# Altium PCB Regulador_Inversor.PcbDoc
Units mm, origin at the board's own origin, x right, y up, seen from the top; angles counter-clockwise.
Board outline 40 x 45 mm, 2 copper layers (Top Layer, Bottom Layer); 16 components, 11 nets, 47 pads, 30 vias.
Unrouted connection lines stored in the file: 1.
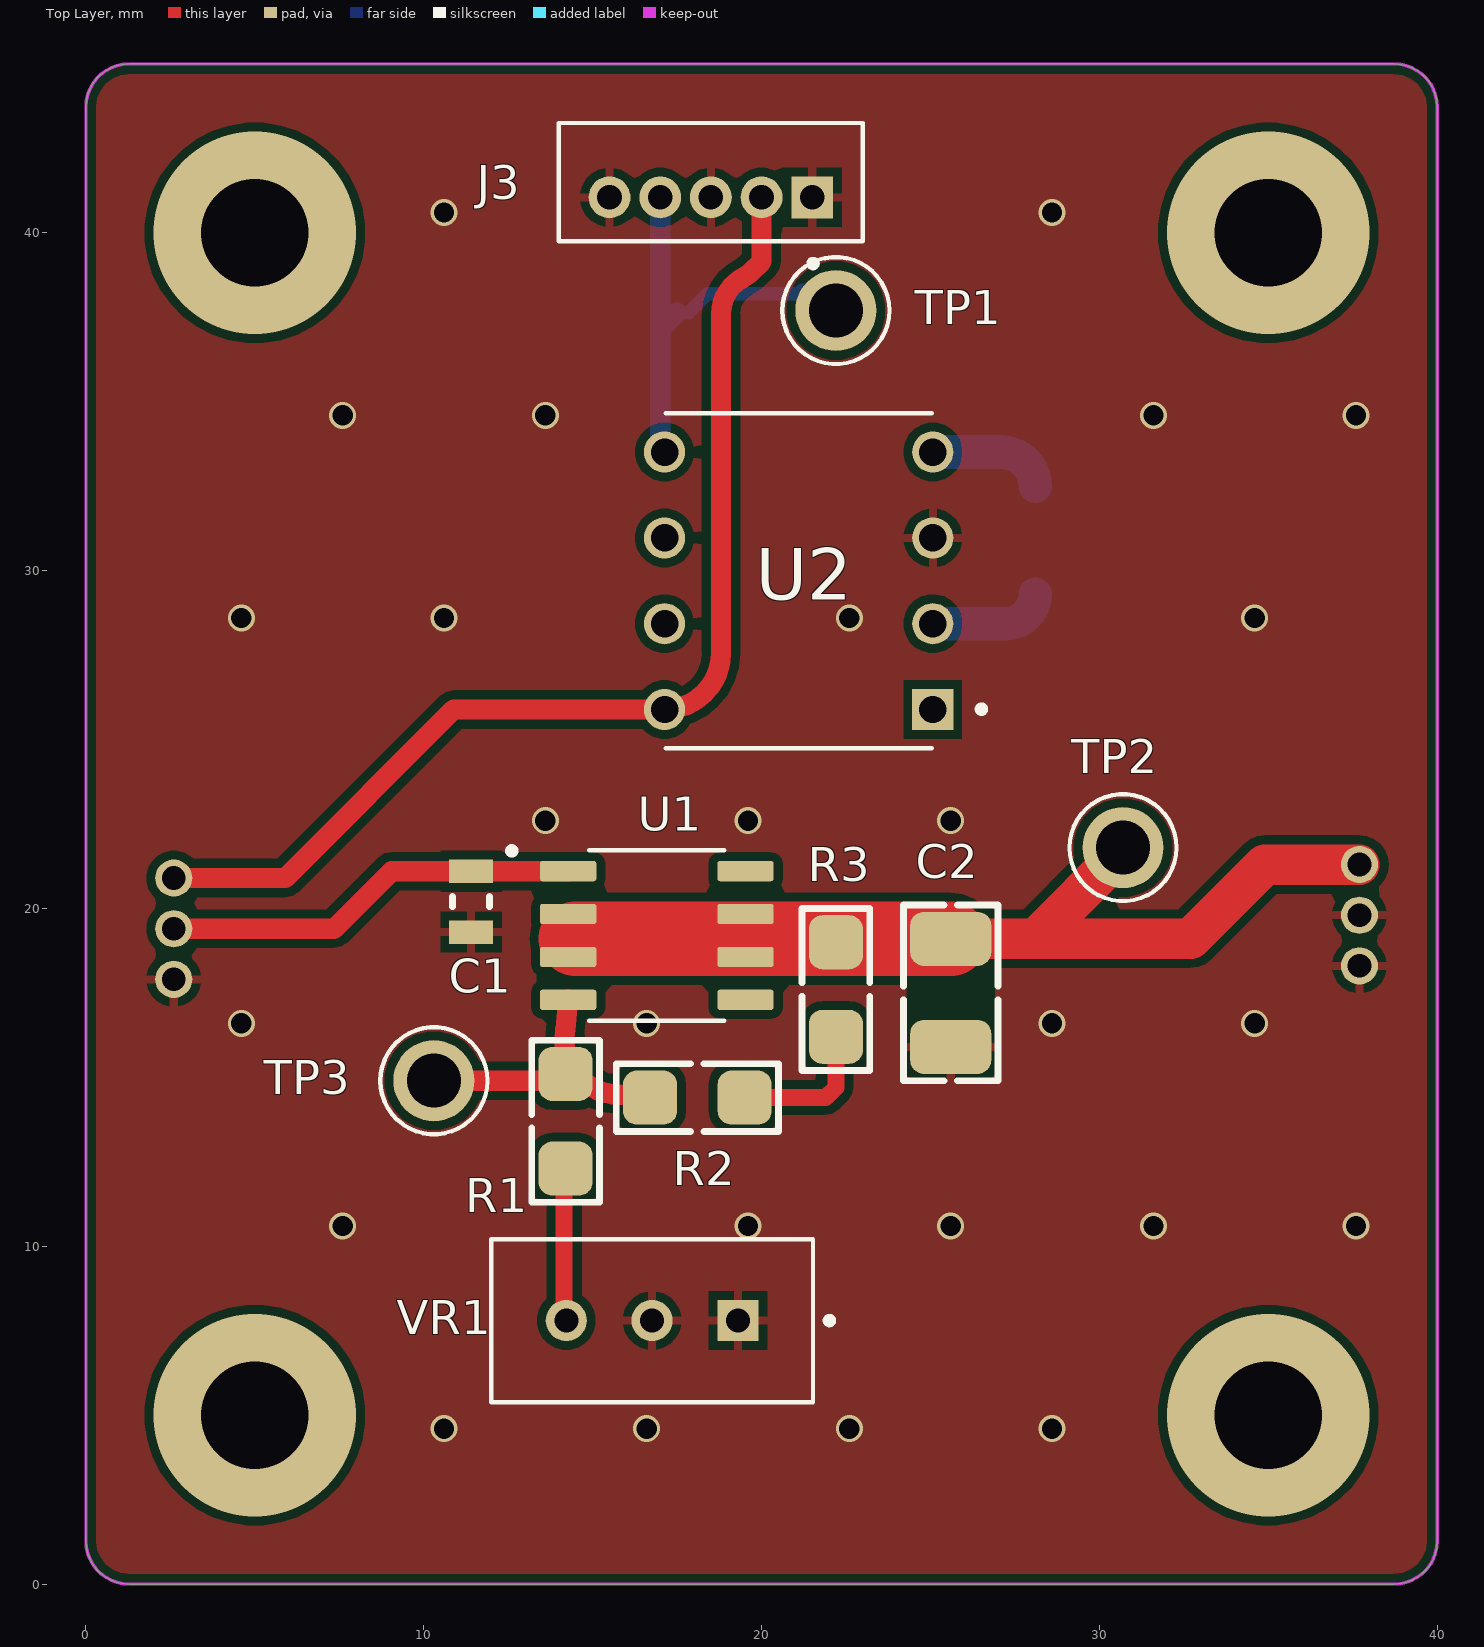
[diagram p0: Top Layer view]
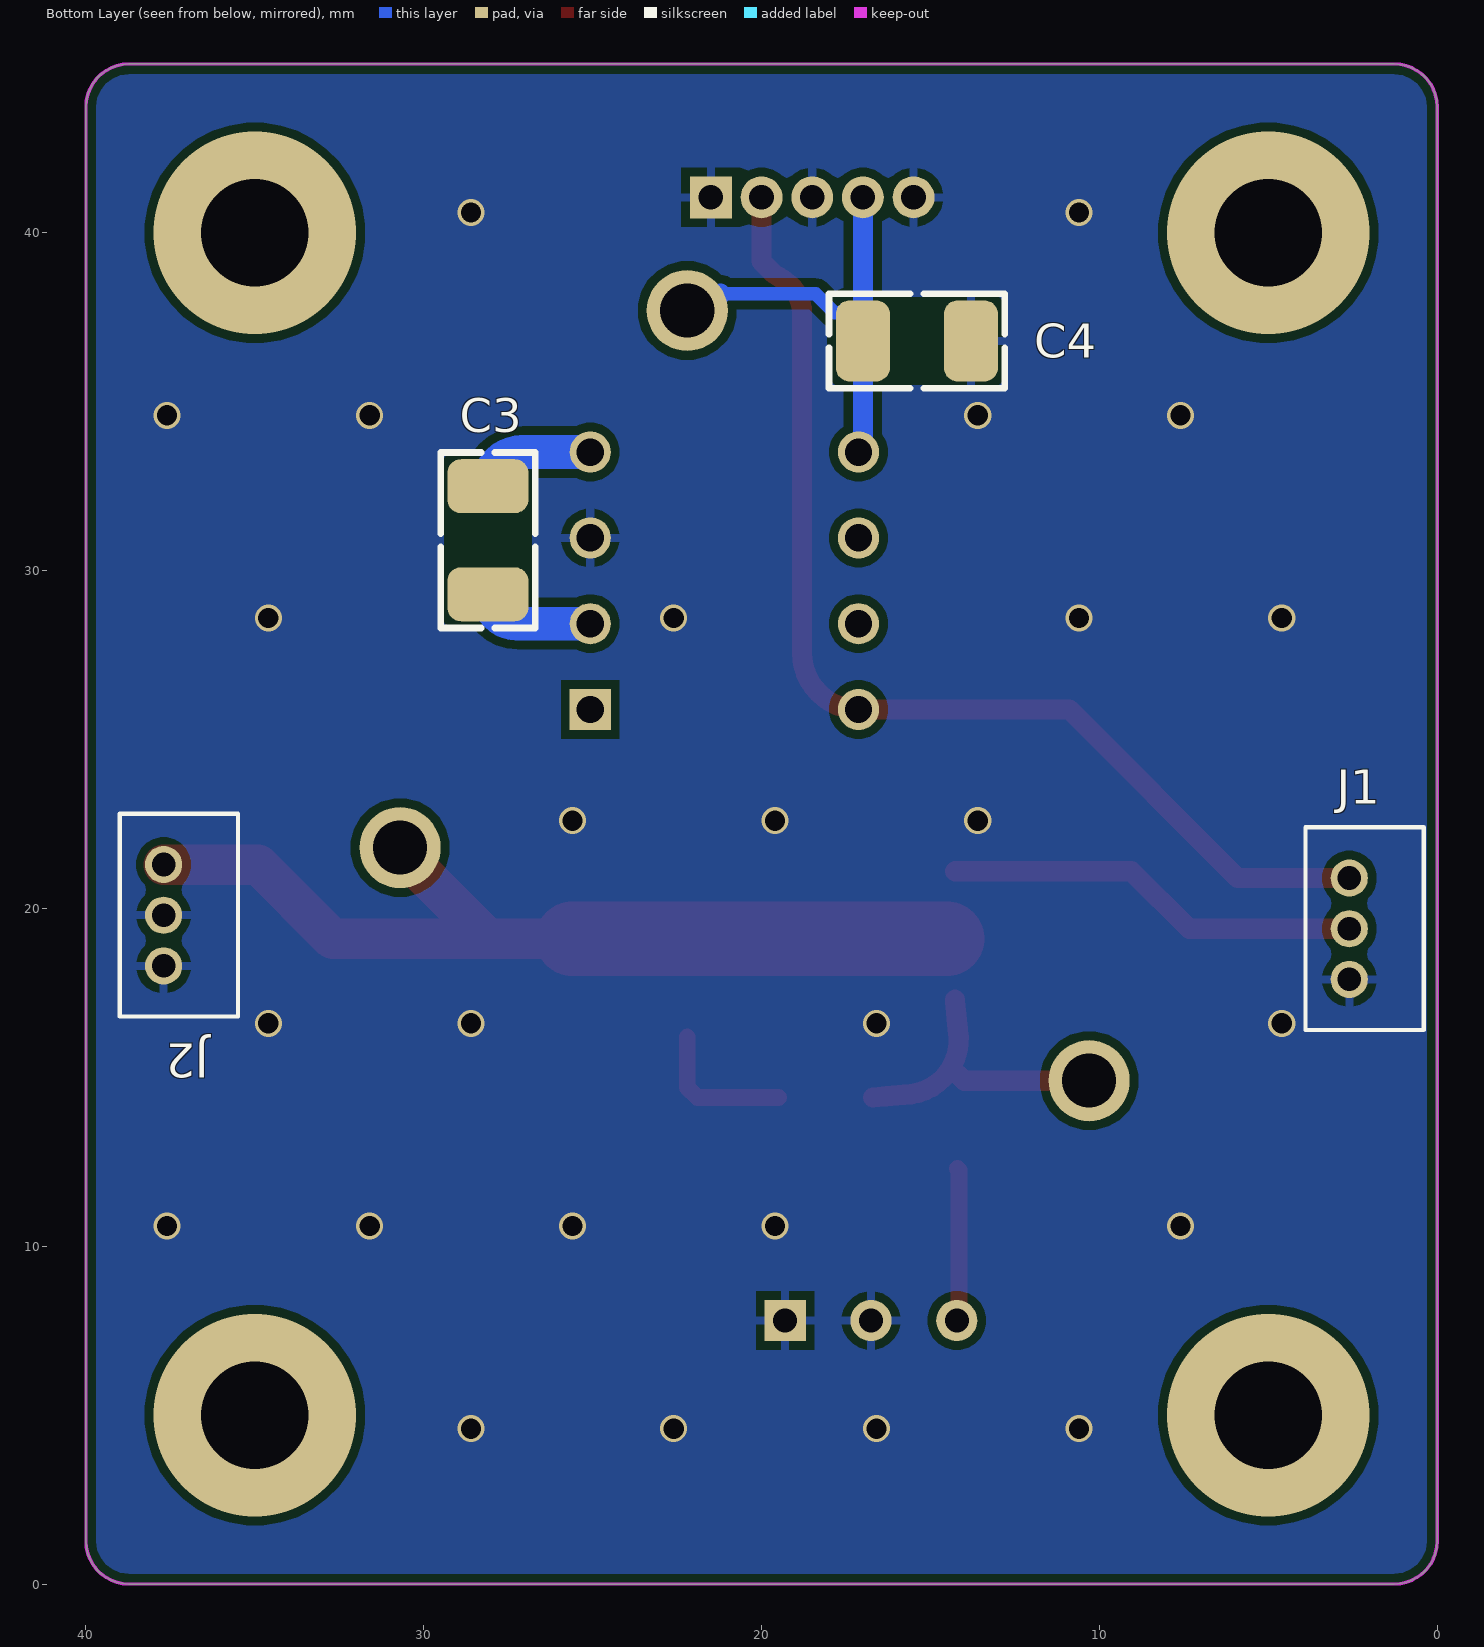
[diagram p1: Bottom Layer view, seen from below]
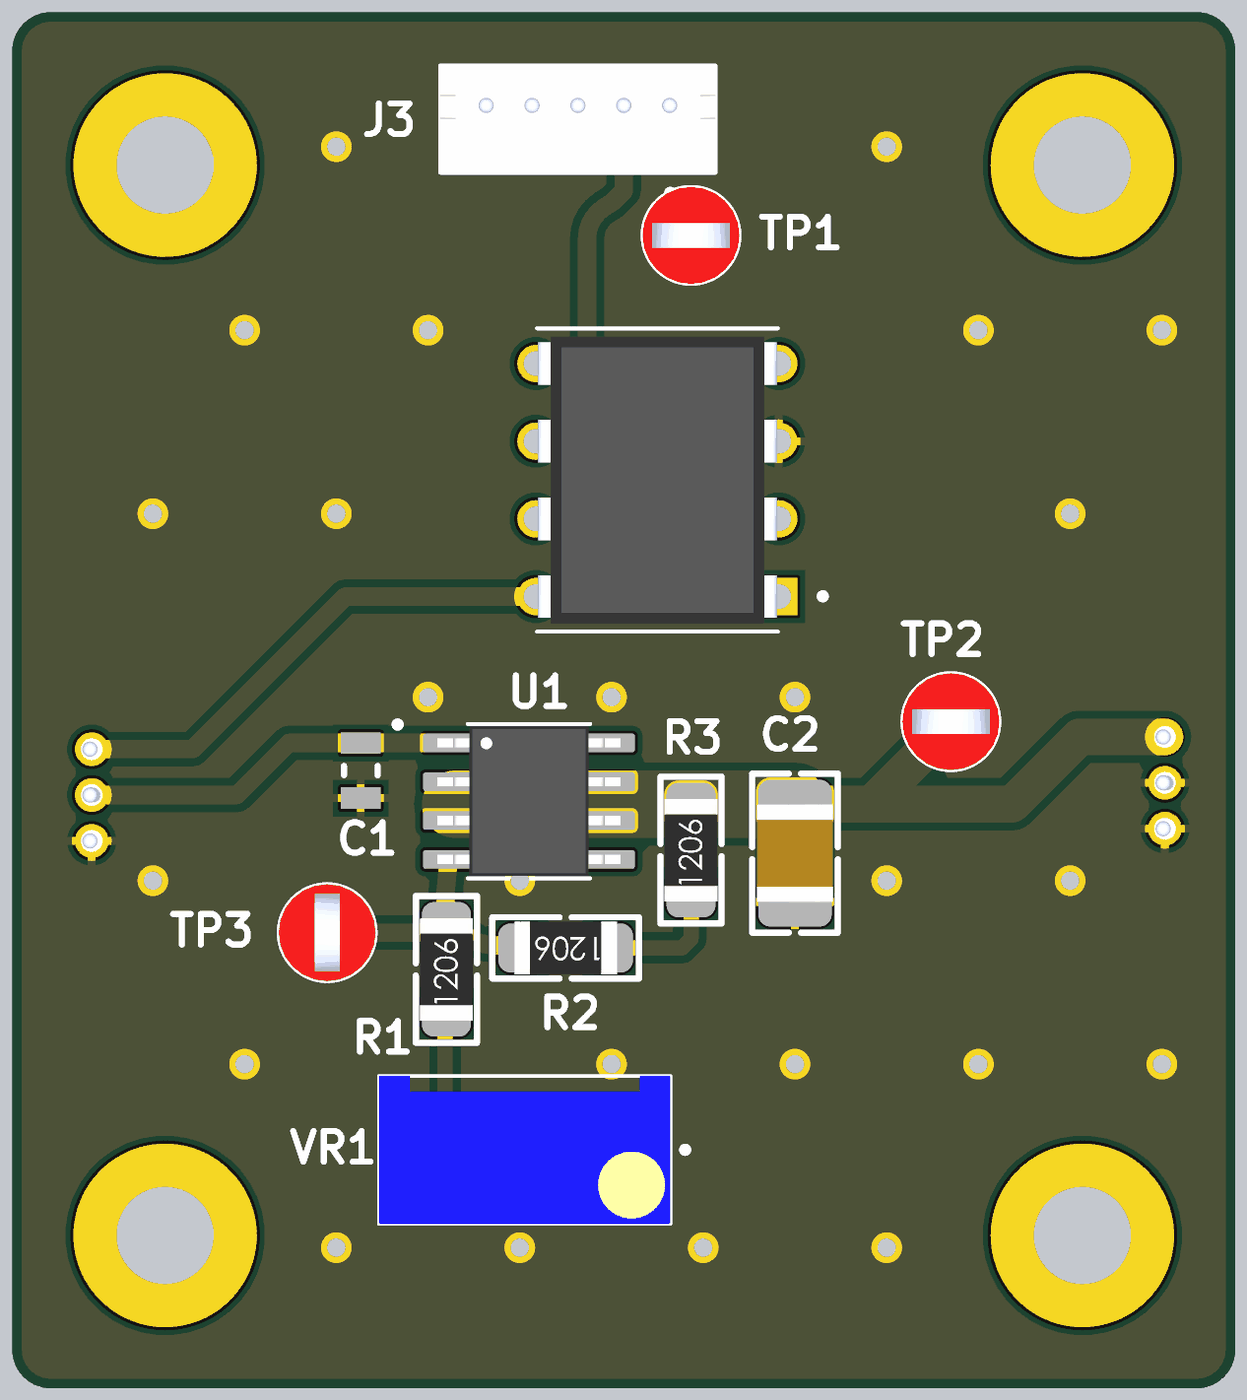
[diagram p2: 3D render of the assembled board from above, using the file's embedded part models]
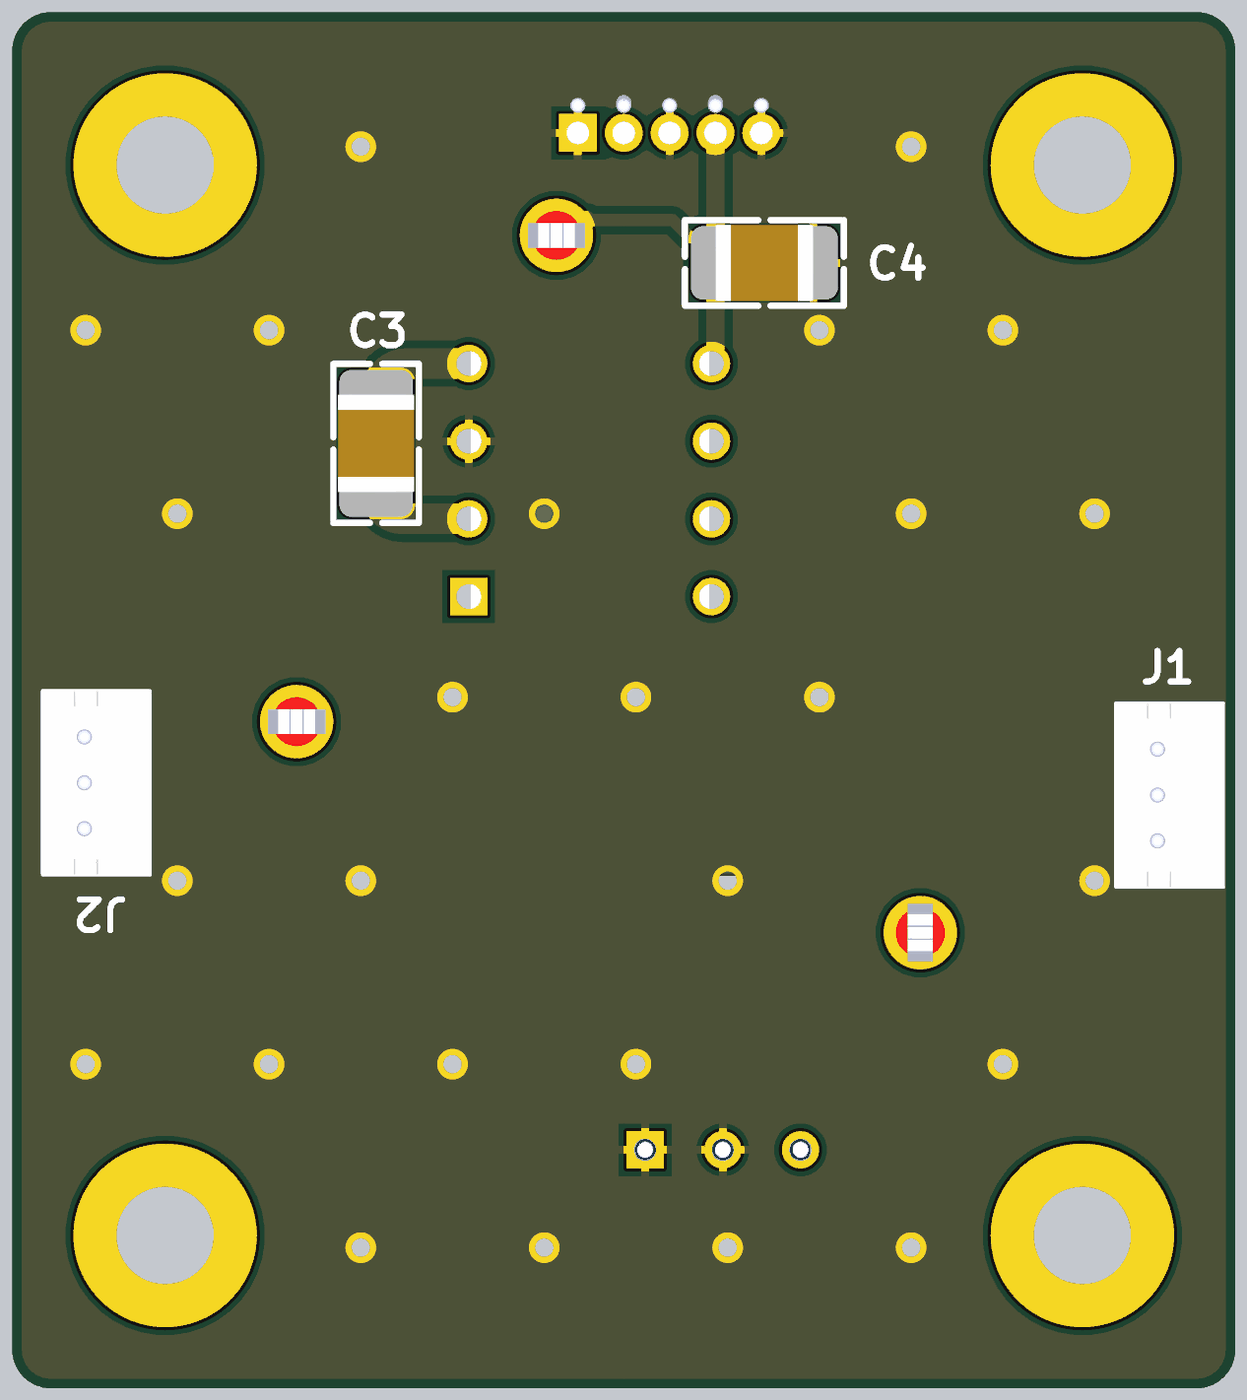
[diagram p3: 3D render of the assembled board from below, using the file's embedded part models]

## Layer stack, top to bottom
Top Solder: solder mask 0.0102, Solder Resist, Dk 3.5
Top Layer: signal copper 0.0356
Dielectric 1: dielectric 0.32, FR-4, Dk 4.8
Bottom Layer: signal copper 0.0356
Bottom Solder: solder mask 0.0102, Solder Resist, Dk 3.5

## Board outline
0,1.27 0,43.73 cw(c1.27,43.73) 1.27,45 38.73,45 cw(c38.73,43.73) 40,43.73 40,1.27 cw(c38.73,1.27) 38.73,0 1.27,0 cw(c1.27,1.27)

## Design rules (kind name [scope] priority, off if disabled: settings)
Clearance [All] p1: gap=0.254 ignorepadtopadclearanceinfootprint=FALSE
PolygonConnect ReliefAncho [IsPad And InPadClass('ReliefAncho')] p1: thpad.connectstyle=Relief thpad.reliefconductorwidth=0.254 thpad.reliefentries=4 thpad.polygonreliefangle="90 Angle" thpad.airgapwidth=0.254 smdpad.connectstyle=Relief smdpad.reliefconductorwidth=1.2 smdpad.reliefentries=4 smdpad.polygonreliefangle="90 Angle" smdpad.airgapwidth=0.3 via.connectstyle=Relief via.reliefconductorwidth=0.254 via.reliefentries=4 via.polygonreliefangle="90 Angle" via.airgapwidth=0.254
PolygonConnect DirectConnect [IsPad And InPadClass('DirectConnect')] p2: connectstyle=Direct reliefconductorwidth=0.254 reliefentries=4 polygonreliefangle="90 Angle" airgapwidth=0.254
PolygonConnect Vias_Shielding_DC [All vs InNet('GND')] p3: thpad.connectstyle=Relief thpad.reliefconductorwidth=0.254 thpad.reliefentries=4 thpad.polygonreliefangle="90 Angle" thpad.airgapwidth=0.254 smdpad.connectstyle=Relief smdpad.reliefconductorwidth=0.254 smdpad.reliefentries=4 smdpad.polygonreliefangle="90 Angle" smdpad.airgapwidth=0.254 via.connectstyle=Direct via.reliefconductorwidth=0.254 via.reliefentries=4 via.polygonreliefangle="90 Angle" via.airgapwidth=0.254
PolygonConnect [All] p4: connectstyle=Relief reliefconductorwidth=0.254 reliefentries=4 polygonreliefangle="90 Angle" airgapwidth=0.254
RoutingVias [All] p1: holewidth=0.711 width=1.27 viastyle="Through Hole" minholewidth=0.1 minwidth=0.1 maxholewidth=0.711 maxwidth=5
SolderMaskExpansion [All] p1: expansion=0.102 istentingtop=FALSE
SupplyNets "Schematic Supply Nets" [InNet('GND')] p1: voltage=0.000
Width [All] p1: maxlimit=10 minlimit=0.254 preferedwidth=0.254
30 further rules are at their usual default settings.

## Components (designator, comment, footprint, x,y, rotation, side; value= is the part's Value field where it differs from the comment)
C1 "0.1uF" CAPC2013X113X30LL10T10 11.4,20.2 r90 top
C2 "10uF" C1210 25.6,17.5 r90 top
C3 "10uF" C1210 28.1,30.9 r270 bottom
C4 "10uF" C1210 15.4,36.8 r0 bottom
J1 "B3B-ZR" B3B-ZR 2.6,19.4 r90 bottom
J2 "B3B-ZR" B3B-ZR 37.7,19.8 r90 bottom
J3 "B5B-ZR(LF)(SN)" JST_B5B-ZR(LF)(SN) 18.5,41.5 r0 top
R1 "4.7KΩ" R1206 14.2,13.7 r90 top
R2 "220Ω" R1206 18.1,14.4 r180 top
R3 "20Ω" R1206 22.2,17.6 r90 top
TP1 "5010" TP_5010 22.2,37.7 r180 top
TP2 "5010" TP_5010 30.7,21.8 r180 top
TP3 "5010" TP_5010 10.3,14.9 r90 top
U1 "LM317LDR2G" SOIC127P600X175-8N 16.9,19.2 r0 top
U2 "ICL7660EPA+" DIP794W47P254L991H457Q8 21.1,29.7 r180 top
VR1 "3296W-1-102" TRIM_3296W-1-102 16.76,7.8 r180 top

## Footprints (in the part's own frame and the unit in brackets; to place one, negate y for a bottom-side part, rotate by r counter-clockwise, add the part's x,y. Pads: shape width x height; smd on the part's side, far side on the other; paste and mask are expansions set on the pad)
B3B-ZR [mm]
  round 1.1 hole 0.7: 1(-1.5,0) 2(0,0) 3(1.5,0)
  silkscreen extent -3,-2.2 3,1.3, body extent -3,-2.26 3,1.24, height 4.5
C1210 [mm] "CHIP Capacitor, 3.2X2.5mm, 1210, 3225"
  rrect50% 1.6x2.4 smd mask+0.075: 1(-1.6,0) 2(1.6,0)
  Top Layer pour cut-out: -0.8,1.3 -0.8,-1.3 0.8,-1.3 0.8,1.3
  silkscreen extent -2.6,-1.4 2.6,1.4, body extent -1.6,-1.25 1.6,1.25, height 1
CAPC2013X113X30LL10T10 [mm] "Chip Capacitor, 2-Leads, Body 2.01x1.27mm, IPC High Density"
  rect 0.7x1.3 smd: 1(-0.9,0) 2(0.9,0)
  silkscreen extent -0.15,-0.55 0.15,0.55, body extent -1.06,-0.68 1.05,0.69, height 1.13
DIP794W47P254L991H457Q8 [mm]
  rect 1.22x1.22 / inner round 1.22 / far side rect 1.22x1.22 hole 0.81: 1(-3.97,3.81)
  round 1.22 hole 0.81: 2(-3.97,1.27) 3(-3.97,-1.27) 4(-3.97,-3.81) 5(3.97,-3.81) 6(3.97,-1.27) 7(3.97,1.27) 8(3.97,3.81)
  silkscreen extent -5.51,-4.96 3.94,4.96, body extent -3.91,-4.69 3.91,4.69, height 4.57
JST_B5B-ZR(LF)(SN) [mm]
  rect 1.238x1.238 / inner round 1.238 / far side rect 1.238x1.238 hole 0.73: 1(3,-0.45)
  round 1.238 hole 0.73: 2(1.5,-0.45) 3(0,-0.45) 4(-1.5,-0.45) 5(-3,-0.45)
  silkscreen extent -4.5,-2.51 4.5,1.75, body extent -4.5,-1.75 4.5,1.75, height 4.5
R1206 [mm] "CHIP RESISTOR 1/4 WATT, Body 3.2x1.6mm,1206, 3216"
  rrect50% 1.6x1.6 smd mask+0.075: 1(-1.4,0) 2(1.4,0)
  silkscreen extent -2.4,-1 2.4,1, body extent -1.67,-0.86 1.68,0.87, height 0.85
SOIC127P600X175-8N [mm]
  rrect25% 1.67x0.6 smd: 1(-2.625,1.905) 2(-2.625,0.635) 3(-2.625,-0.635) 4(-2.625,-1.905) 5(2.625,-1.905) 6(2.625,-0.635) 7(2.625,0.635) 8(2.625,1.905)
  silkscreen extent -4.39,-2.52 2,2.6, body extent -3,-2.45 3,2.45, height 1.75
TP_5010 [mm]
  round 2.4 hole 1.6: TP(0,0)
  silkscreen extent -1.59,-1.58 1.59,1.58, body extent -1.59,-1.59 1.59,1.59, height 8.13
TRIM_3296W-1-102 [mm]
  rect 1.218x1.218 / inner round 1.218 / far side rect 1.218x1.218 hole 0.71: 1(-2.54,0)
  round 1.218 hole 0.71: 2(0,0) 3(2.54,0)
  silkscreen extent -5.35,-2.41 4.76,2.42, body extent -4.76,-2.41 4.76,2.42, height 11.55

## Part data
C1: library part 0805, "50V 0805"
C2 C3 C4: library part CAP_SMD_FILM_1u16v_1210, "10 µF Molded Tantalum Capacitors 16 V 1411 (3528 Metric), 1210 500mOhm", ComponentLink1Description=Compra, ComponentLink1URL=https://www.digikey.com/en/products/detail/kyocera-avx/TPSB106K016R0500/1472653, ID=478-5230-1-ND
J1 J2: "Connector Header Surface Mount 3 position 0.059 (1.50mm)", Package=None, Check_prices=https://www.snapeda.com/parts/B3B-ZR/JST+Sales+America+Inc./view-part/?ref=eda, MF="JST Sales", MP=B3B-ZR, SnapEDA_Link=https://www.snapeda.com/parts/B3B-ZR/JST+Sales+America+Inc./view-part/?ref=snap
J3: "Conn Shrouded Header HDR 5 POS 1.5mm Solder ST Thru-Hole Box", Package=None, Check_prices=https://www.snapeda.com/parts/B5B-ZR%20(LF)(SN)/JST/view-part/?ref=eda, MF=JST, MP="B5B-ZR (LF)(SN)", SnapEDA_Link=https://www.snapeda.com/parts/B5B-ZR%20(LF)(SN)/JST/view-part/?ref=snap
R1 R2 R3: library part RES_SMD_1206, "RESISTOR, SMD", ComponentLink1Description=Compra
TP1 TP2 TP3: "Test Point MultiPurpose THM .445 L .125 OD Heat Resistant Nylon 46 Red", Package="NON STANDARD-1 Keystone", Check_prices=https://www.snapeda.com/parts/5010/Keystone/view-part/?ref=eda, MF="Keystone Electronics", MP=5010, SnapEDA_Link=https://www.snapeda.com/parts/5010/Keystone/view-part/?ref=snap
U1: "Linear Voltage Regulator IC Positive Adjustable 1 Output 100mA 8-SOIC", Package="SOIC-8 ON Semiconductor", Check_prices=https://www.snapeda.com/parts/LM317LDR2G/Onsemi/view-part/?ref=eda, MF="ON Semiconductor", MP=LM317LDR2G, SnapEDA_Link=https://www.snapeda.com/parts/LM317LDR2G/Onsemi/view-part/?ref=snap
U2: "Switched-Capacitor Voltage Converters", Package="PDIP-8 Maxim", Availability="In Stock", Check_prices=https://www.snapeda.com/parts/ICL7660EPA+/Analog+Devices/view-part/?ref=eda, MF="Analog Devices", MP=ICL7660EPA+, Price=None, Purchase-URL=https://pricing.snapeda.com/search/part/ICL7660EPA+/?ref=eda, SnapEDA_Link=https://www.snapeda.com/parts/ICL7660EPA+/Analog+Devices/view-part/?ref=snap
VR1: "TRIMMER - 3/8in SQ MT CERMET", Package="NON STANDARD-3 Bourns", Check_prices=https://www.snapeda.com/parts/3296W-1-102/Bourns/view-part/?ref=eda, MF=Bourns, MP=3296W-1-102, SnapEDA_Link=https://www.snapeda.com/parts/3296W-1-102/Bourns/view-part/?ref=snap

## Via types
v1: diameter 0.8, hole 0.6, Top Layer to Bottom Layer, 26 vias
v2: diameter 6, hole 3.18, Top Layer to Bottom Layer, 4 vias

## Nets (pads, with @x,y where several pads share a name; then routed paths per layer and width w, separated by ;. In a path a pad name is that pad's centre, name@x,y a point inside that pad or via, vN(x,y) a via of type N, cw(c..) or ccw(c..) an arc to the next point about the centre after c; other vN are vias at no path point)
+4V: J1.3 J3.2 U2.8 | length 33.2
  Top Layer w0.6: J1.3 5.9,20.9 10.89,25.89 U2.8 ccw(c17.13,27.56) 18.8,27.56 18.8,37.6 cw(c20,37.6) 19.353,38.61 19.649,38.8 20,39.151 J3.2
+29.5V: C2.2 J2.3 R3.2 TP2.TP U1.2 U1.3 U1.6 U1.7 | length 27.9
  Top Layer w1.2: C2.2 28.1,19.1 ; TP2.TP 30.7,21.7 28.1,19.1 ; J2.3 34.9,21.3 32.7,19.1 28.1,19.1
  Top Layer w2.2: 14.5,19.1 C2.2
+VBAT: C1.2 J1.2 U1.1 | length 12.4
  Top Layer w0.6: J1.2 7.345,19.4 9.05,21.105 U1.1
-4V: C4.2 J3.4 TP1.TP U2.5 | length 13.8
  Bottom Layer w0.4: C4.2@17.492,37.638 17.838,37.638 18.4,38.2 TP1.TP@21.213,38.2
  Bottom Layer w0.6: C4.2 J3.4 ; U2.5 17,33.64 17,37.146 C4.2@17.492,37.638 ; TP1.TP@21.213,38.2 21.713,37.7 TP1.TP
GND: C1.1 C2.1 C4.1 J1.1 J2.1 J2.2 J3.1 J3.3 J3.5 U2.3 VR1.1 VR1.2
  other v1: 10.6,4.6 16.6,4.6 22.6,4.6 28.6,4.6 7.6,10.6 19.6,10.6 25.6,10.6 31.6,10.6 37.6,10.6 4.6,16.6 16.6,16.6 28.6,16.6 34.6,16.6 13.6,22.6 19.6,22.6 25.6,22.6 4.6,28.6 10.6,28.6 22.6,28.6 34.6,28.6 7.6,34.6 13.6,34.6 31.6,34.6 37.6,34.6 10.6,40.6 28.6,40.6
NetC3_1: C3.1 U2.4 | length 3.6
  Bottom Layer w1: U2.4 27.09,33.51 cw(c27.09,32.5) C3.1
NetC3_2: C3.2 U2.2 | length 3.5
  Bottom Layer w1: U2.2 27.23,28.43 ccw(c27.23,29.3) C3.2
NetR1_1: R1.1 VR1.3 | length 4.5
  Top Layer w0.5: R1.1 14.157,12.257 14.157,7.863 VR1.3
NetR1_2: R1.2 R2.2 TP3.TP U1.4 | length 8.6
  Top Layer w0.6: TP3.TP 14,14.9 R1.2 ; U1.4 14.27,17.245 14.191,16.425 ccw(c15.79,16.116) 15.79,14.487 16.3,14.438 R2.2
NetR2_1: R2.1 R3.1 | length 4.3
  Top Layer w0.5: R2.1 21.9,14.4 22.2,14.7 R3.1
"NetU1_5, 8": U1.5 U1.8
pads on no net: U2.1 U2.6 U2.7
copper on no net:
  other v2: 5,5 35,5 5,40 35,40

## Polygon pours and split planes (outlines as drawn)
GND on Top Layer "NONET_L-01_P-001" (solid, pour order 0): 0,1.27 0,43.73 cw(c1.27,43.73) 1.27,45 38.73,45 cw(c38.73,43.73) 40,43.73 40,1.27 cw(c38.73,1.27) 38.73,0 1.27,0 cw(c1.27,1.27)
GND on Bottom Layer "NONET_L-01_P-001" (solid, pour order 1): 0,1.27 0,43.73 cw(c1.27,43.73) 1.27,45 38.73,45 cw(c38.73,43.73) 40,43.73 40,1.27 cw(c38.73,1.27) 38.73,0 1.27,0 cw(c1.27,1.27)

## Keep-outs
Keep-Out Layer:
  lines w0.1: 0,1.27 ccw(c1.27,1.27) 1.27,0 4.8,0 38.73,0 ccw(c38.73,1.27) 40,1.27 40,43.73 ccw(c38.73,43.73) 38.73,45 1.27,45 ccw(c1.27,43.73) 0,43.73 0,1.27